# EAGLE board eib-32-intan-hs_panel (EAGLE 8.3.2)
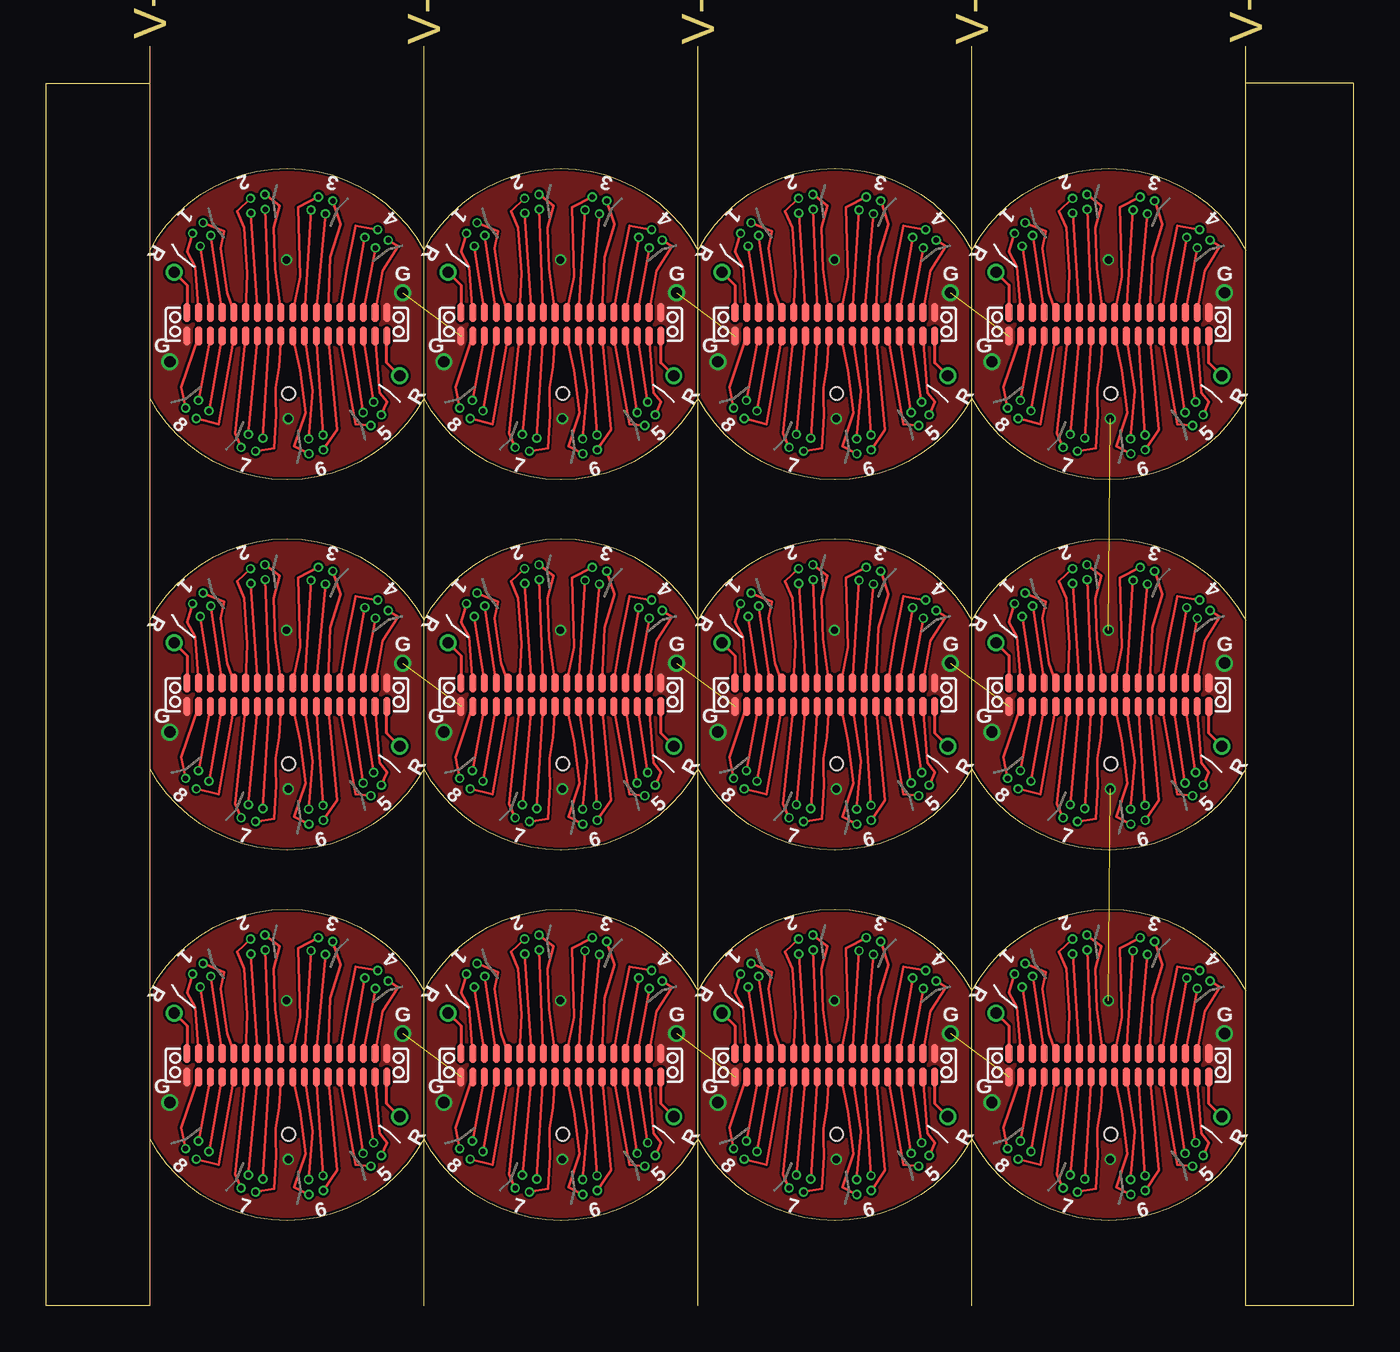
[diagram p0: board, top side]
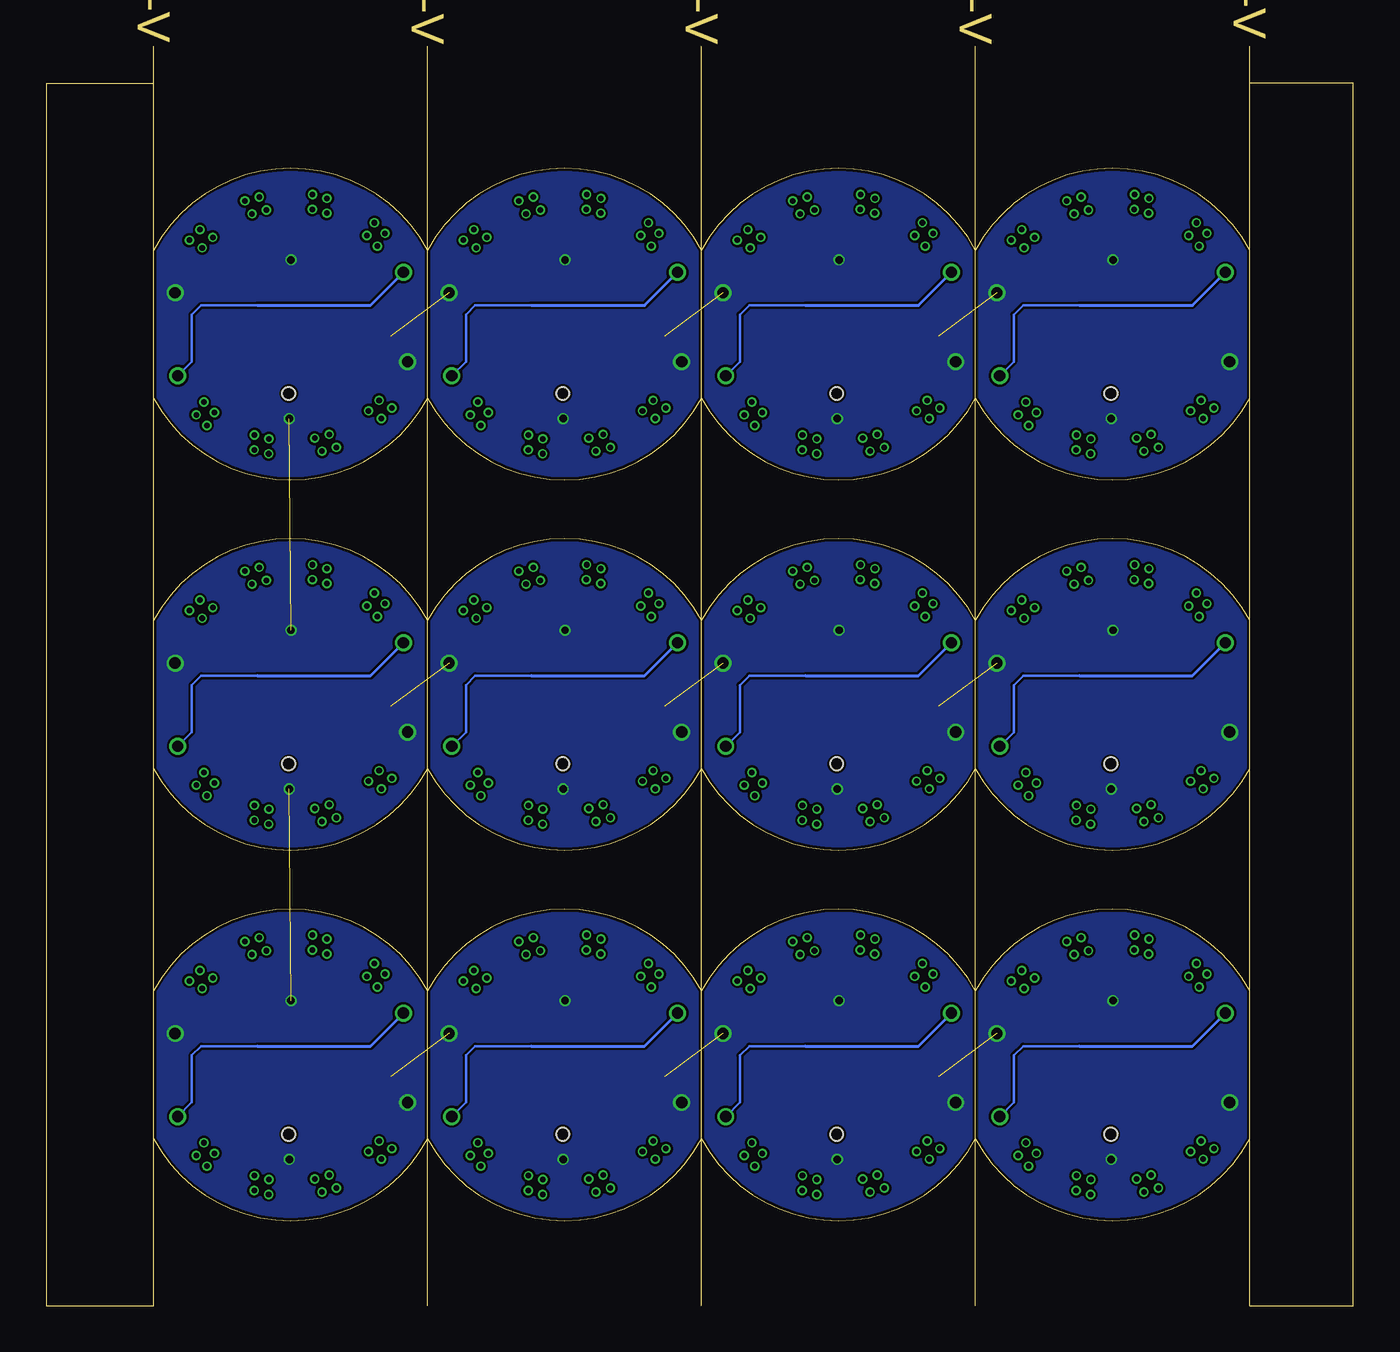
[diagram p1: board, bottom side, seen from below]

Size 70.6 x 68 mm. Coordinates in mm from the lower left corner, seen from the top.
Outline: 5.6,17 arc-123 20.4,17 arc-123 35.2,17 arc-123 50,17 arc-123 64.8,17
Outline: 5.6,9 arc123 20.4,9 arc123 35.2,9 arc123 50,9 arc123 64.8,9
Outline: 5.6,37 arc-123 20.4,37 arc-123 35.2,37 arc-123 50,37 arc-123 64.8,37
Outline: 5.6,29 arc123 20.4,29 arc123 35.2,29 arc123 50,29 arc123 64.8,29
Outline: 5.6,57 arc-123 20.4,57 arc-123 35.2,57 arc-123 50,57 arc-123 64.8,57
Outline: 5.6,49 arc123 20.4,49 arc123 35.2,49 arc123 50,49 arc123 64.8,49
Outline: 5.6,66 0,66 0,0 5.6,0 5.6,66
Outline: 20.4,0 20.4,68
Outline: 35.2,0 35.2,68
Outline: 50,0 50,68
Outline: 64.8,66 64.8,0 70.6,0 70.6,66 64.8,66
Outline: 64.8,66 64.8,68
Outline: 5.6,66 5.6,68
Copper layers (1*16): Top 0.035mm / dielectric 1.5mm / Bottom 0.035mm
Design rules "pcb-cart-standard-4-layer *": minimum track width 5mil, minimum drill 0.3mm, track to track 5mil, track to pad 5mil, pad to pad 5mil, via to via 5mil, smd to smd 5mil, copper to edge 6mil, drill to drill 6mil, minimum pad ring 3mil, minimum via ring 3mil, stop-mask expansion 2mil, vias tented up to drill 20mil, thermal gap 10mil
Holes 0.7 mm at 13.1,9.25 27.9,9.25 42.7,9.25 57.5,9.25 13.1,29.25 27.9,29.25 42.7,29.25 57.5,29.25 13.1,49.25 27.9,49.25 42.7,49.25 57.5,49.25

## Footprints (pad centres in the part's own frame; a part is rotated, then mirrored left to right if it is on the bottom)
NPD-36-VV-GS = smd 0.381 x 1.016: P$1 0,0; P$2 0.635,0; P$3 1.27,0; P$4 1.905,0; P$5 2.54,0; P$6 3.175,0; P$7 3.81,0; P$8 4.445,0; P$9 5.08,0; P$10 5.715,0; P$11 6.35,0; P$12 6.985,0; P$13 7.62,0; P$14 8.255,0; P$15 8.89,0; P$16 9.525,0; P$17 10.16,0; P$18 10.795,0; P$19 10.795,1.27; P$20 10.16,1.27; P$21 9.525,1.27; P$22 8.89,1.27; P$23 8.255,1.27; P$24 7.62,1.27; P$25 6.985,1.27; P$26 6.35,1.27; P$27 5.715,1.27; P$28 5.08,1.27; P$29 4.445,1.27; P$30 3.81,1.27; P$31 3.175,1.27; P$32 2.54,1.27; P$33 1.905,1.27; P$34 1.27,1.27; P$35 0.635,1.27; P$36 0,1.27
TET8 = drill 0.3 pad 0.5: P$1 -1,7; P$2 -0.2,7.1; P$3 -0.3,6.3; P$4 -1.1,6.2

## Placement (x,y rotation side)
J1  4  [NPD-36-VV-GS]  22.4,12.35 0 top
J2  4  [NPD-36-VV-GS]  37.2,12.35 0 top
J3  4  [NPD-36-VV-GS]  52,12.35 0 top
J4  4  [NPD-36-VV-GS]  7.6,32.35 0 top
J5  4  [NPD-36-VV-GS]  7.6,12.35 0 top
J6  4  [NPD-36-VV-GS]  22.4,32.35 0 top
J7  4  [NPD-36-VV-GS]  37.2,32.35 0 top
J8  4  [NPD-36-VV-GS]  52,32.35 0 top
J9  4  [NPD-36-VV-GS]  7.6,52.35 0 top
J10  4  [NPD-36-VV-GS]  22.4,52.35 0 top
J11  4  [NPD-36-VV-GS]  37.2,52.35 0 top
J12  4  [NPD-36-VV-GS]  52,52.35 0 top
TET1  0  [TET8]  27.8,13 8 top
TET2  1  [TET8]  27.8,13 38 top
TET3  4  [TET8]  27.8,13 128 top
TET4  5  [TET8]  27.8,13 158 top
TET5  6  [TET8]  27.8,13 188 top
TET6  7  [TET8]  27.8,13 218 top
TET7  10  [TET8]  27.8,13 308 top
TET8  11  [TET8]  27.8,13 338 top
TET9  0  [TET8]  42.6,13 8 top
TET10  1  [TET8]  42.6,13 38 top
TET11  4  [TET8]  42.6,13 128 top
TET12  5  [TET8]  42.6,13 158 top
TET13  6  [TET8]  42.6,13 188 top
TET14  7  [TET8]  42.6,13 218 top
TET15  10  [TET8]  42.6,13 308 top
TET16  11  [TET8]  42.6,13 338 top
TET17  0  [TET8]  57.4,13 8 top
TET18  1  [TET8]  57.4,13 38 top
TET19  4  [TET8]  57.4,13 128 top
TET20  5  [TET8]  57.4,13 158 top
TET21  6  [TET8]  57.4,13 188 top
TET22  7  [TET8]  57.4,13 218 top
TET23  10  [TET8]  57.4,13 308 top
TET24  11  [TET8]  57.4,13 338 top
TET25  0  [TET8]  13,33 8 top
TET26  1  [TET8]  13,33 38 top
TET27  4  [TET8]  13,33 128 top
TET28  5  [TET8]  13,33 158 top
TET29  6  [TET8]  13,33 188 top
TET30  7  [TET8]  13,33 218 top
TET31  10  [TET8]  13,33 308 top
TET32  11  [TET8]  13,33 338 top
TET33  0  [TET8]  27.8,33 8 top
TET34  1  [TET8]  27.8,33 38 top
TET35  4  [TET8]  27.8,33 128 top
TET36  5  [TET8]  27.8,33 158 top
TET37  6  [TET8]  27.8,33 188 top
TET38  7  [TET8]  27.8,33 218 top
TET39  10  [TET8]  27.8,33 308 top
TET40  11  [TET8]  27.8,33 338 top
TET41  0  [TET8]  42.6,33 8 top
TET42  1  [TET8]  42.6,33 38 top
TET43  4  [TET8]  42.6,33 128 top
TET44  5  [TET8]  42.6,33 158 top
TET45  6  [TET8]  42.6,33 188 top
TET46  7  [TET8]  42.6,33 218 top
TET47  10  [TET8]  42.6,33 308 top
TET48  11  [TET8]  42.6,33 338 top
TET49  0  [TET8]  57.4,33 8 top
TET50  1  [TET8]  57.4,33 38 top
TET51  4  [TET8]  57.4,33 128 top
TET52  5  [TET8]  57.4,33 158 top
TET53  6  [TET8]  57.4,33 188 top
TET54  7  [TET8]  57.4,33 218 top
TET55  10  [TET8]  57.4,33 308 top
TET56  11  [TET8]  57.4,33 338 top
TET57  0  [TET8]  13,53 8 top
TET58  1  [TET8]  13,53 38 top
TET59  4  [TET8]  13,53 128 top
TET60  5  [TET8]  13,53 158 top
TET61  6  [TET8]  13,53 188 top
TET62  7  [TET8]  13,53 218 top
TET63  10  [TET8]  13,53 308 top
TET64  0  [TET8]  13,13 8 top
TET65  1  [TET8]  13,13 38 top
TET66  4  [TET8]  13,13 128 top
TET67  5  [TET8]  13,13 158 top
TET68  6  [TET8]  13,13 188 top
TET69  7  [TET8]  13,13 218 top
TET70  10  [TET8]  13,13 308 top
TET71  11  [TET8]  13,13 338 top
TET72  11  [TET8]  13,53 338 top
TET73  0  [TET8]  27.8,53 8 top
TET74  1  [TET8]  27.8,53 38 top
TET75  4  [TET8]  27.8,53 128 top
TET76  5  [TET8]  27.8,53 158 top
TET77  6  [TET8]  27.8,53 188 top
TET78  7  [TET8]  27.8,53 218 top
TET79  10  [TET8]  27.8,53 308 top
TET80  11  [TET8]  27.8,53 338 top
TET81  0  [TET8]  42.6,53 8 top
TET82  1  [TET8]  42.6,53 38 top
TET83  4  [TET8]  42.6,53 128 top
TET84  5  [TET8]  42.6,53 158 top
TET85  6  [TET8]  42.6,53 188 top
TET86  7  [TET8]  42.6,53 218 top
TET87  10  [TET8]  42.6,53 308 top
TET88  11  [TET8]  42.6,53 338 top
TET89  0  [TET8]  57.4,53 8 top
TET90  1  [TET8]  57.4,53 38 top
TET91  4  [TET8]  57.4,53 128 top
TET92  5  [TET8]  57.4,53 158 top
TET93  6  [TET8]  57.4,53 188 top
TET94  7  [TET8]  57.4,53 218 top
TET95  10  [TET8]  57.4,53 308 top
TET96  11  [TET8]  57.4,53 338 top

## Library data of the parts
J1-J12 = open-ephys
TET1-TET96 = tetrodes

## Nets
GND: J1.P$1 J1.P$19 J2.P$1 J2.P$19 J3.P$1 J3.P$19 J4.P$1 J4.P$19 J5.P$1 J5.P$19 J6.P$1 J6.P$19 J7.P$1 J7.P$19 J8.P$1 J8.P$19 J9.P$1 J9.P$19 J10.P$1 J10.P$19 J11.P$1 J11.P$19 J12.P$1 J12.P$19
N$1: J1.P$35 TET2.P$1
N$2: J1.P$32 TET2.P$2
N$3: J1.P$33 TET2.P$3
N$4: J1.P$34 TET2.P$4
N$5: J1.P$28 TET1.P$2
N$6: J1.P$30 TET1.P$4
N$7: J1.P$29 TET1.P$3
N$8: J1.P$31 TET1.P$1
N$9: J1.P$27 TET8.P$1
N$10: J1.P$24 TET8.P$2
N$11: J1.P$26 TET8.P$4
N$12: J1.P$25 TET8.P$3
N$13: J1.P$23 TET7.P$1
N$14: J1.P$20 TET7.P$2
N$15: J1.P$22 TET7.P$4
N$16: J1.P$21 TET7.P$3
N$17: J1.P$17 TET6.P$1
N$18: J1.P$14 TET6.P$2
N$19: J1.P$16 TET6.P$4
N$20: J1.P$15 TET6.P$3
N$21: J1.P$13 TET5.P$1
N$22: J1.P$9 TET4.P$1
N$23: J1.P$5 TET3.P$1
N$24: J1.P$10 TET5.P$2
N$25: J1.P$12 TET5.P$4
N$26: J1.P$11 TET5.P$3
N$27: J1.P$7 TET4.P$3
N$28: J1.P$8 TET4.P$4
N$29: J1.P$6 TET4.P$2
N$30: J1.P$3 TET3.P$3
N$31: J1.P$4 TET3.P$4
N$32: J1.P$2 TET3.P$2
N$33: J2.P$35 TET10.P$1
N$34: J2.P$32 TET10.P$2
N$35: J2.P$33 TET10.P$3
N$36: J2.P$34 TET10.P$4
N$37: J2.P$28 TET9.P$2
N$38: J2.P$30 TET9.P$4
N$39: J2.P$29 TET9.P$3
N$40: J2.P$31 TET9.P$1
N$41: J2.P$27 TET16.P$1
N$42: J2.P$24 TET16.P$2
N$43: J2.P$26 TET16.P$4
N$44: J2.P$25 TET16.P$3
N$45: J2.P$23 TET15.P$1
N$46: J2.P$20 TET15.P$2
N$47: J2.P$22 TET15.P$4
N$48: J2.P$21 TET15.P$3
N$49: J2.P$17 TET14.P$1
N$50: J2.P$14 TET14.P$2
N$51: J2.P$16 TET14.P$4
N$52: J2.P$15 TET14.P$3
N$53: J2.P$13 TET13.P$1
N$54: J2.P$9 TET12.P$1
N$55: J2.P$5 TET11.P$1
N$56: J2.P$10 TET13.P$2
N$57: J2.P$12 TET13.P$4
N$58: J2.P$11 TET13.P$3
N$59: J2.P$7 TET12.P$3
N$60: J2.P$8 TET12.P$4
N$61: J2.P$6 TET12.P$2
N$62: J2.P$3 TET11.P$3
N$63: J2.P$4 TET11.P$4
N$64: J2.P$2 TET11.P$2
N$65: J3.P$35 TET18.P$1
N$66: J3.P$32 TET18.P$2
N$67: J3.P$33 TET18.P$3
N$68: J3.P$34 TET18.P$4
N$69: J3.P$28 TET17.P$2
N$70: J3.P$30 TET17.P$4
N$71: J3.P$29 TET17.P$3
N$72: J3.P$31 TET17.P$1
N$73: J3.P$27 TET24.P$1
N$74: J3.P$24 TET24.P$2
N$75: J3.P$26 TET24.P$4
N$76: J3.P$25 TET24.P$3
N$77: J3.P$23 TET23.P$1
N$78: J3.P$20 TET23.P$2
N$79: J3.P$22 TET23.P$4
N$80: J3.P$21 TET23.P$3
N$81: J3.P$17 TET22.P$1
N$82: J3.P$14 TET22.P$2
N$83: J3.P$16 TET22.P$4
N$84: J3.P$15 TET22.P$3
N$85: J3.P$13 TET21.P$1
N$86: J3.P$9 TET20.P$1
N$87: J3.P$5 TET19.P$1
N$88: J3.P$10 TET21.P$2
N$89: J3.P$12 TET21.P$4
N$90: J3.P$11 TET21.P$3
N$91: J3.P$7 TET20.P$3
N$92: J3.P$8 TET20.P$4
N$93: J3.P$6 TET20.P$2
N$94: J3.P$3 TET19.P$3
N$95: J3.P$4 TET19.P$4
N$96: J3.P$2 TET19.P$2
N$97: J4.P$35 TET26.P$1
N$98: J4.P$32 TET26.P$2
N$99: J4.P$33 TET26.P$3
N$100: J4.P$34 TET26.P$4
N$101: J4.P$28 TET25.P$2
N$102: J4.P$30 TET25.P$4
N$103: J4.P$29 TET25.P$3
N$104: J4.P$31 TET25.P$1
N$105: J4.P$27 TET32.P$1
N$106: J4.P$24 TET32.P$2
N$107: J4.P$26 TET32.P$4
N$108: J4.P$25 TET32.P$3
N$109: J4.P$23 TET31.P$1
N$110: J4.P$20 TET31.P$2
N$111: J4.P$22 TET31.P$4
N$112: J4.P$21 TET31.P$3
N$113: J4.P$17 TET30.P$1
N$114: J4.P$14 TET30.P$2
N$115: J4.P$16 TET30.P$4
N$116: J4.P$15 TET30.P$3
N$117: J4.P$13 TET29.P$1
N$118: J4.P$9 TET28.P$1
N$119: J4.P$5 TET27.P$1
N$120: J4.P$10 TET29.P$2
N$121: J4.P$12 TET29.P$4
N$122: J4.P$11 TET29.P$3
N$123: J4.P$7 TET28.P$3
N$124: J4.P$8 TET28.P$4
N$125: J4.P$6 TET28.P$2
N$126: J4.P$3 TET27.P$3
N$127: J4.P$4 TET27.P$4
N$128: J4.P$2 TET27.P$2
N$129: J6.P$35 TET34.P$1
N$130: J6.P$32 TET34.P$2
N$131: J6.P$33 TET34.P$3
N$132: J6.P$34 TET34.P$4
N$133: J6.P$28 TET33.P$2
N$134: J6.P$30 TET33.P$4
N$135: J6.P$29 TET33.P$3
N$136: J6.P$31 TET33.P$1
N$137: J6.P$27 TET40.P$1
N$138: J6.P$24 TET40.P$2
N$139: J6.P$26 TET40.P$4
N$140: J6.P$25 TET40.P$3
N$141: J6.P$23 TET39.P$1
N$142: J6.P$20 TET39.P$2
N$143: J6.P$22 TET39.P$4
N$144: J6.P$21 TET39.P$3
N$145: J6.P$17 TET38.P$1
N$146: J6.P$14 TET38.P$2
N$147: J6.P$16 TET38.P$4
N$148: J6.P$15 TET38.P$3
N$149: J6.P$13 TET37.P$1
N$150: J6.P$9 TET36.P$1
N$151: J6.P$5 TET35.P$1
N$152: J6.P$10 TET37.P$2
N$153: J6.P$12 TET37.P$4
N$154: J6.P$11 TET37.P$3
N$155: J6.P$7 TET36.P$3
N$156: J6.P$8 TET36.P$4
N$157: J6.P$6 TET36.P$2
N$158: J6.P$3 TET35.P$3
N$159: J6.P$4 TET35.P$4
N$160: J6.P$2 TET35.P$2
N$161: J7.P$35 TET42.P$1
N$162: J7.P$32 TET42.P$2
N$163: J7.P$33 TET42.P$3
N$164: J7.P$34 TET42.P$4
N$165: J7.P$28 TET41.P$2
N$166: J7.P$30 TET41.P$4
N$167: J7.P$29 TET41.P$3
N$168: J7.P$31 TET41.P$1
N$169: J7.P$27 TET48.P$1
N$170: J7.P$24 TET48.P$2
N$171: J7.P$26 TET48.P$4
N$172: J7.P$25 TET48.P$3
N$173: J7.P$23 TET47.P$1
N$174: J7.P$20 TET47.P$2
N$175: J7.P$22 TET47.P$4
N$176: J7.P$21 TET47.P$3
N$177: J7.P$17 TET46.P$1
N$178: J7.P$14 TET46.P$2
N$179: J7.P$16 TET46.P$4
N$180: J7.P$15 TET46.P$3
N$181: J7.P$13 TET45.P$1
N$182: J7.P$9 TET44.P$1
N$183: J7.P$5 TET43.P$1
N$184: J7.P$10 TET45.P$2
N$185: J7.P$12 TET45.P$4
N$186: J7.P$11 TET45.P$3
N$187: J7.P$7 TET44.P$3
N$188: J7.P$8 TET44.P$4
N$189: J7.P$6 TET44.P$2
N$190: J7.P$3 TET43.P$3
N$191: J7.P$4 TET43.P$4
N$192: J7.P$2 TET43.P$2
N$193: J8.P$35 TET50.P$1
N$194: J8.P$32 TET50.P$2
N$195: J8.P$33 TET50.P$3
N$196: J8.P$34 TET50.P$4
N$197: J8.P$28 TET49.P$2
N$198: J8.P$30 TET49.P$4
N$199: J8.P$29 TET49.P$3
N$200: J8.P$31 TET49.P$1
N$201: J8.P$27 TET56.P$1
N$202: J8.P$24 TET56.P$2
N$203: J8.P$26 TET56.P$4
N$204: J8.P$25 TET56.P$3
N$205: J8.P$23 TET55.P$1
N$206: J8.P$20 TET55.P$2
N$207: J8.P$22 TET55.P$4
N$208: J8.P$21 TET55.P$3
N$209: J8.P$17 TET54.P$1
N$210: J8.P$14 TET54.P$2
N$211: J8.P$16 TET54.P$4
N$212: J8.P$15 TET54.P$3
N$213: J8.P$13 TET53.P$1
N$214: J8.P$9 TET52.P$1
N$215: J8.P$5 TET51.P$1
N$216: J8.P$10 TET53.P$2
N$217: J8.P$12 TET53.P$4
N$218: J8.P$11 TET53.P$3
N$219: J8.P$7 TET52.P$3
N$220: J8.P$8 TET52.P$4
N$221: J8.P$6 TET52.P$2
N$222: J8.P$3 TET51.P$3
N$223: J8.P$4 TET51.P$4
N$224: J8.P$2 TET51.P$2
N$225: J9.P$35 TET58.P$1
N$226: J9.P$32 TET58.P$2
N$227: J9.P$33 TET58.P$3
N$228: J9.P$34 TET58.P$4
N$229: J9.P$28 TET57.P$2
N$230: J9.P$30 TET57.P$4
N$231: J9.P$29 TET57.P$3
N$232: J9.P$31 TET57.P$1
N$233: J9.P$27 TET72.P$1
N$234: J9.P$24 TET72.P$2
N$235: J9.P$26 TET72.P$4
N$236: J9.P$25 TET72.P$3
N$237: J9.P$23 TET63.P$1
N$238: J9.P$20 TET63.P$2
N$239: J9.P$22 TET63.P$4
N$240: J9.P$21 TET63.P$3
N$241: J9.P$17 TET62.P$1
N$242: J9.P$14 TET62.P$2
N$243: J9.P$16 TET62.P$4
N$244: J9.P$15 TET62.P$3
N$245: J9.P$13 TET61.P$1
N$246: J9.P$9 TET60.P$1
N$247: J9.P$5 TET59.P$1
N$248: J9.P$10 TET61.P$2
N$249: J9.P$12 TET61.P$4
N$250: J9.P$11 TET61.P$3
N$251: J9.P$7 TET60.P$3
N$252: J9.P$8 TET60.P$4
N$253: J9.P$6 TET60.P$2
N$254: J9.P$3 TET59.P$3
N$255: J9.P$4 TET59.P$4
N$256: J9.P$2 TET59.P$2
N$257: J5.P$35 TET65.P$1
N$258: J5.P$32 TET65.P$2
N$259: J5.P$33 TET65.P$3
N$260: J5.P$34 TET65.P$4
N$261: J5.P$28 TET64.P$2
N$262: J5.P$30 TET64.P$4
N$263: J5.P$29 TET64.P$3
N$264: J5.P$31 TET64.P$1
N$265: J5.P$27 TET71.P$1
N$266: J5.P$24 TET71.P$2
N$267: J5.P$26 TET71.P$4
N$268: J5.P$25 TET71.P$3
N$269: J5.P$23 TET70.P$1
N$270: J5.P$20 TET70.P$2
N$271: J5.P$22 TET70.P$4
N$272: J5.P$21 TET70.P$3
N$273: J5.P$17 TET69.P$1
N$274: J5.P$14 TET69.P$2
N$275: J5.P$16 TET69.P$4
N$276: J5.P$15 TET69.P$3
N$277: J5.P$13 TET68.P$1
N$278: J5.P$9 TET67.P$1
N$279: J5.P$5 TET66.P$1
N$280: J5.P$10 TET68.P$2
N$281: J5.P$12 TET68.P$4
N$282: J5.P$11 TET68.P$3
N$283: J5.P$7 TET67.P$3
N$284: J5.P$8 TET67.P$4
N$285: J5.P$6 TET67.P$2
N$286: J5.P$3 TET66.P$3
N$287: J5.P$4 TET66.P$4
N$288: J5.P$2 TET66.P$2
N$289: J10.P$35 TET74.P$1
N$290: J10.P$32 TET74.P$2
N$291: J10.P$33 TET74.P$3
N$292: J10.P$34 TET74.P$4
N$293: J10.P$28 TET73.P$2
N$294: J10.P$30 TET73.P$4
N$295: J10.P$29 TET73.P$3
N$296: J10.P$31 TET73.P$1
N$297: J10.P$27 TET80.P$1
N$298: J10.P$24 TET80.P$2
N$299: J10.P$26 TET80.P$4
N$300: J10.P$25 TET80.P$3
N$301: J10.P$23 TET79.P$1
N$302: J10.P$20 TET79.P$2
N$303: J10.P$22 TET79.P$4
N$304: J10.P$21 TET79.P$3
N$305: J10.P$17 TET78.P$1
N$306: J10.P$14 TET78.P$2
N$307: J10.P$16 TET78.P$4
N$308: J10.P$15 TET78.P$3
N$309: J10.P$13 TET77.P$1
N$310: J10.P$9 TET76.P$1
N$311: J10.P$5 TET75.P$1
N$312: J10.P$10 TET77.P$2
N$313: J10.P$12 TET77.P$4
N$314: J10.P$11 TET77.P$3
N$315: J10.P$7 TET76.P$3
N$316: J10.P$8 TET76.P$4
N$317: J10.P$6 TET76.P$2
N$318: J10.P$3 TET75.P$3
N$319: J10.P$4 TET75.P$4
N$320: J10.P$2 TET75.P$2
N$321: J11.P$35 TET82.P$1
N$322: J11.P$32 TET82.P$2
N$323: J11.P$33 TET82.P$3
N$324: J11.P$34 TET82.P$4
N$325: J11.P$28 TET81.P$2
N$326: J11.P$30 TET81.P$4
N$327: J11.P$29 TET81.P$3
N$328: J11.P$31 TET81.P$1
N$329: J11.P$27 TET88.P$1
N$330: J11.P$24 TET88.P$2
N$331: J11.P$26 TET88.P$4
N$332: J11.P$25 TET88.P$3
N$333: J11.P$23 TET87.P$1
N$334: J11.P$20 TET87.P$2
N$335: J11.P$22 TET87.P$4
N$336: J11.P$21 TET87.P$3
N$337: J11.P$17 TET86.P$1
N$338: J11.P$14 TET86.P$2
N$339: J11.P$16 TET86.P$4
N$340: J11.P$15 TET86.P$3
N$341: J11.P$13 TET85.P$1
N$342: J11.P$9 TET84.P$1
N$343: J11.P$5 TET83.P$1
N$344: J11.P$10 TET85.P$2
N$345: J11.P$12 TET85.P$4
N$346: J11.P$11 TET85.P$3
N$347: J11.P$7 TET84.P$3
N$348: J11.P$8 TET84.P$4
N$349: J11.P$6 TET84.P$2
N$350: J11.P$3 TET83.P$3
N$351: J11.P$4 TET83.P$4
N$352: J11.P$2 TET83.P$2
N$353: J12.P$35 TET90.P$1
N$354: J12.P$32 TET90.P$2
N$355: J12.P$33 TET90.P$3
N$356: J12.P$34 TET90.P$4
N$357: J12.P$28 TET89.P$2
N$358: J12.P$30 TET89.P$4
N$359: J12.P$29 TET89.P$3
N$360: J12.P$31 TET89.P$1
N$361: J12.P$27 TET96.P$1
N$362: J12.P$24 TET96.P$2
N$363: J12.P$26 TET96.P$4
N$364: J12.P$25 TET96.P$3
N$365: J12.P$23 TET95.P$1
N$366: J12.P$20 TET95.P$2
N$367: J12.P$22 TET95.P$4
N$368: J12.P$21 TET95.P$3
N$369: J12.P$17 TET94.P$1
N$370: J12.P$14 TET94.P$2
N$371: J12.P$16 TET94.P$4
N$372: J12.P$15 TET94.P$3
N$373: J12.P$13 TET93.P$1
N$374: J12.P$9 TET92.P$1
N$375: J12.P$5 TET91.P$1
N$376: J12.P$10 TET93.P$2
N$377: J12.P$12 TET93.P$4
N$378: J12.P$11 TET93.P$3
N$379: J12.P$7 TET92.P$3
N$380: J12.P$8 TET92.P$4
N$381: J12.P$6 TET92.P$2
N$382: J12.P$3 TET91.P$3
N$383: J12.P$4 TET91.P$4
N$384: J12.P$2 TET91.P$2
REF1: J1.P$18 J1.P$36
REF2: J2.P$18 J2.P$36
REF3: J3.P$18 J3.P$36
REF4: J5.P$18 J5.P$36
REF5: J4.P$18 J4.P$36
REF6: J6.P$18 J6.P$36
REF7: J7.P$18 J7.P$36
REF8: J8.P$18 J8.P$36
REF9: J9.P$18 J9.P$36
REF10: J10.P$18 J10.P$36
REF11: J11.P$18 J11.P$36
REF12: J12.P$18 J12.P$36

## Tracks (layer width: path | path; a pad name or v marks a point on that pad's centre or on a via)
GND  (via drill 0.4, 0.61)  (11 unrouted)
  Top 0.128: 18.92,14.46 v19.25,14.69 | 33.72,14.46 v34.05,14.69 | 48.52,14.46 v48.85,14.69 | 63.32,14.46 v63.65,14.69 | 18.92,54.46 v19.25,54.69 | 33.72,54.46 v34.05,54.69 | 48.52,54.46 v48.85,54.69 | 63.32,54.46 v63.65,54.69 | 18.92,34.46 v19.25,34.69 | 33.72,34.46 v34.05,34.69 | 48.52,34.46 v48.85,34.69 | 63.32,34.46 v63.65,34.69
  other vias: 12.98,16.47 13.07,7.9 6.68,10.97 27.78,16.47 27.87,7.9 21.48,10.97 42.58,16.47 42.67,7.9 36.28,10.97 57.38,16.47 57.47,7.9 51.08,10.97 12.98,56.47 13.07,47.9 6.68,50.97 27.78,56.47 27.87,47.9 21.48,50.97 42.58,56.47 42.67,47.9 36.28,50.97 57.38,56.47 57.47,47.9 51.08,50.97 12.98,36.47 13.07,27.9 6.68,30.97 27.78,36.47 27.87,27.9 21.48,30.97 42.58,36.47 42.67,27.9 36.28,30.97 57.38,36.47 57.47,27.9 51.08,30.97
  pour Bottom (no thermals): -7.55,124.35 123.45,124.35 123.45,-8.65 -7.55,-8.65
  pour Top (no thermals): -10.55,127.35 126.45,127.35 126.45,-11.65 -10.55,-11.65
N$1
  Top 0.127: J1.P$35 22.84,16.1 22.4,16.9 TET2.P$1
N$2
  Top 0.127: J1.P$32 24.57,14.7 24.21,17.1 24.4,18 TET2.P$2
N$3
  Top 0.127: TET2.P$3 J1.P$33
N$4
  Top 0.127: TET2.P$4 J1.P$34
N$5
  Top 0.127: J1.P$28 27.16,16 27.07,18.2 27.4,19.4 TET1.P$2
N$6
  Top 0.127: TET1.P$4 J1.P$30
N$7
  Top 0.127: J1.P$29 TET1.P$3
N$8
  Top 0.127: J1.P$31 25.66,15.74 25.5,18.19 25.1,19.1 TET1.P$1
N$9
  Top 0.127: J1.P$27 28.5,15.56 28.4,19.3 TET8.P$1
N$10
  Top 0.127: J1.P$24 30.15,16.61 30.7,18.4 TET8.P$2
N$11
  Top 0.127: TET8.P$4 J1.P$26
N$12
  Top 0.127: TET8.P$3 J1.P$25
N$13
  Top 0.127: J1.P$23 31.01,15.9 31.5,18.3 TET7.P$1
N$14
  Top 0.127: J1.P$20 32.97,15.89 33.8,17.2 TET7.P$2
N$15
  Top 0.127: TET7.P$4 J1.P$22
N$16
  Top 0.127: TET7.P$3 J1.P$21
N$17
  Top 0.127: J1.P$17 32.8,9.3 33.2,8.8 TET6.P$1
N$18
  Top 0.127: TET6.P$2 31.5,7.6 J1.P$14
N$19
  Top 0.127: TET6.P$4 J1.P$16
N$20
  Top 0.127: TET6.P$3 J1.P$15
N$21
  Top 0.127: J1.P$13 30.5,7.3 TET5.P$1
N$22
  Top 0.127: TET4.P$1 27.1,6.3 27.21,8.1 27.18,8.95 27.18,8.96 27.18,9.55 27.38,10.7 J1.P$9
N$23
  Top 0.127: TET3.P$1 24.1,7.6 J1.P$5
N$24
  Top 0.127: TET5.P$2 28.2,6.4 28.8,8.2 28.5,10.5 J1.P$10
N$25
  Top 0.127: TET5.P$4 J1.P$12
N$26
  Top 0.127: J1.P$11 29.2,9.4 TET5.P$3
N$27
  Top 0.127: TET4.P$3 J1.P$7
N$28
  Top 0.127: TET4.P$4 J1.P$8
N$29
  Top 0.127: TET4.P$2 25,7.1 J1.P$6
N$30
  Top 0.127: TET3.P$3 J1.P$3
N$31
  Top 0.127: TET3.P$4 J1.P$4
N$32
  Top 0.127: TET3.P$2 22.1,9.6 J1.P$2
N$33
  Top 0.127: J2.P$35 37.64,16.1 37.2,16.9 TET10.P$1
N$34
  Top 0.127: J2.P$32 39.37,14.7 39.01,17.1 39.2,18 TET10.P$2
N$35
  Top 0.127: TET10.P$3 J2.P$33
N$36
  Top 0.127: TET10.P$4 J2.P$34
N$37
  Top 0.127: J2.P$28 41.96,16 41.87,18.2 42.2,19.4 TET9.P$2
N$38
  Top 0.127: TET9.P$4 J2.P$30
N$39
  Top 0.127: J2.P$29 TET9.P$3
N$40
  Top 0.127: J2.P$31 40.46,15.74 40.3,18.19 39.9,19.1 TET9.P$1
N$41
  Top 0.127: J2.P$27 43.3,15.56 43.2,19.3 TET16.P$1
N$42
  Top 0.127: J2.P$24 44.95,16.61 45.5,18.4 TET16.P$2
N$43
  Top 0.127: TET16.P$4 J2.P$26
N$44
  Top 0.127: TET16.P$3 J2.P$25
N$45
  Top 0.127: J2.P$23 45.81,15.9 46.3,18.3 TET15.P$1
N$46
  Top 0.127: J2.P$20 47.77,15.89 48.6,17.2 TET15.P$2
N$47
  Top 0.127: TET15.P$4 J2.P$22
N$48
  Top 0.127: TET15.P$3 J2.P$21
N$49
  Top 0.127: J2.P$17 47.6,9.3 48,8.8 TET14.P$1
N$50
  Top 0.127: TET14.P$2 46.3,7.6 J2.P$14
N$51
  Top 0.127: TET14.P$4 J2.P$16
N$52
  Top 0.127: TET14.P$3 J2.P$15
N$53
  Top 0.127: J2.P$13 45.3,7.3 TET13.P$1
N$54
  Top 0.127: TET12.P$1 41.9,6.3 42.01,8.1 41.98,8.95 41.98,8.96 41.98,9.55 42.18,10.7 J2.P$9
N$55
  Top 0.127: TET11.P$1 38.9,7.6 J2.P$5
N$56
  Top 0.127: TET13.P$2 43,6.4 43.6,8.2 43.3,10.5 J2.P$10
N$57
  Top 0.127: TET13.P$4 J2.P$12
N$58
  Top 0.127: J2.P$11 44,9.4 TET13.P$3
N$59
  Top 0.127: TET12.P$3 J2.P$7
N$60
  Top 0.127: TET12.P$4 J2.P$8
N$61
  Top 0.127: TET12.P$2 39.8,7.1 J2.P$6
N$62
  Top 0.127: TET11.P$3 J2.P$3
N$63
  Top 0.127: TET11.P$4 J2.P$4
N$64
  Top 0.127: TET11.P$2 36.9,9.6 J2.P$2
N$65
  Top 0.127: J3.P$35 52.44,16.1 52,16.9 TET18.P$1
N$66
  Top 0.127: J3.P$32 54.17,14.7 53.81,17.1 54,18 TET18.P$2
N$67
  Top 0.127: TET18.P$3 J3.P$33
N$68
  Top 0.127: TET18.P$4 J3.P$34
N$69
  Top 0.127: J3.P$28 56.76,16 56.67,18.2 57,19.4 TET17.P$2
N$70
  Top 0.127: TET17.P$4 J3.P$30
N$71
  Top 0.127: J3.P$29 TET17.P$3
N$72
  Top 0.127: J3.P$31 55.26,15.74 55.1,18.19 54.7,19.1 TET17.P$1
N$73
  Top 0.127: J3.P$27 58.1,15.56 58,19.3 TET24.P$1
N$74
  Top 0.127: J3.P$24 59.75,16.61 60.3,18.4 TET24.P$2
N$75
  Top 0.127: TET24.P$4 J3.P$26
N$76
  Top 0.127: TET24.P$3 J3.P$25
N$77
  Top 0.127: J3.P$23 60.61,15.9 61.1,18.3 TET23.P$1
N$78
  Top 0.127: J3.P$20 62.57,15.89 63.4,17.2 TET23.P$2
N$79
  Top 0.127: TET23.P$4 J3.P$22
N$80
  Top 0.127: TET23.P$3 J3.P$21
N$81
  Top 0.127: J3.P$17 62.4,9.3 62.8,8.8 TET22.P$1
N$82
  Top 0.127: TET22.P$2 61.1,7.6 J3.P$14
N$83
  Top 0.127: TET22.P$4 J3.P$16
N$84
  Top 0.127: TET22.P$3 J3.P$15
N$85
  Top 0.127: J3.P$13 60.1,7.3 TET21.P$1
N$86
  Top 0.127: TET20.P$1 56.7,6.3 56.81,8.1 56.78,8.95 56.78,8.96 56.78,9.55 56.98,10.7 J3.P$9
N$87
  Top 0.127: TET19.P$1 53.7,7.6 J3.P$5
N$88
  Top 0.127: TET21.P$2 57.8,6.4 58.4,8.2 58.1,10.5 J3.P$10
N$89
  Top 0.127: TET21.P$4 J3.P$12
N$90
  Top 0.127: J3.P$11 58.8,9.4 TET21.P$3
N$91
  Top 0.127: TET20.P$3 J3.P$7
N$92
  Top 0.127: TET20.P$4 J3.P$8
N$93
  Top 0.127: TET20.P$2 54.6,7.1 J3.P$6
N$94
  Top 0.127: TET19.P$3 J3.P$3
N$95
  Top 0.127: TET19.P$4 J3.P$4
N$96
  Top 0.127: TET19.P$2 51.7,9.6 J3.P$2
N$97
  Top 0.127: J4.P$35 8.04,36.1 7.6,36.9 TET26.P$1
N$98
  Top 0.127: J4.P$32 9.77,34.7 9.41,37.1 9.6,38 TET26.P$2
N$99
  Top 0.127: TET26.P$3 J4.P$33
N$100
  Top 0.127: TET26.P$4 J4.P$34
N$101
  Top 0.127: J4.P$28 12.36,36 12.27,38.2 12.6,39.4 TET25.P$2
N$102
  Top 0.127: TET25.P$4 J4.P$30
N$103
  Top 0.127: J4.P$29 TET25.P$3
N$104
  Top 0.127: J4.P$31 10.86,35.74 10.7,38.19 10.3,39.1 TET25.P$1
N$105
  Top 0.127: J4.P$27 13.7,35.56 13.6,39.3 TET32.P$1
N$106
  Top 0.127: J4.P$24 15.35,36.61 15.9,38.4 TET32.P$2
N$107
  Top 0.127: TET32.P$4 J4.P$26
N$108
  Top 0.127: TET32.P$3 J4.P$25
N$109
  Top 0.127: J4.P$23 16.21,35.9 16.7,38.3 TET31.P$1
N$110
  Top 0.127: J4.P$20 18.17,35.89 19,37.2 TET31.P$2
N$111
  Top 0.127: TET31.P$4 J4.P$22
N$112
  Top 0.127: TET31.P$3 J4.P$21
N$113
  Top 0.127: J4.P$17 18,29.3 18.4,28.8 TET30.P$1
N$114
  Top 0.127: TET30.P$2 16.7,27.6 J4.P$14
N$115
  Top 0.127: TET30.P$4 J4.P$16
N$116
  Top 0.127: TET30.P$3 J4.P$15
N$117
  Top 0.127: J4.P$13 15.7,27.3 TET29.P$1
N$118
  Top 0.127: TET28.P$1 12.3,26.3 12.41,28.1 12.38,28.95 12.38,29.55 12.58,30.7 J4.P$9
N$119
  Top 0.127: TET27.P$1 9.3,27.6 J4.P$5
N$120
  Top 0.127: TET29.P$2 13.4,26.4 14,28.2 13.7,30.5 J4.P$10
N$121
  Top 0.127: TET29.P$4 J4.P$12
N$122
  Top 0.127: J4.P$11 14.4,29.4 TET29.P$3
N$123
  Top 0.127: TET28.P$3 J4.P$7
N$124
  Top 0.127: TET28.P$4 J4.P$8
N$125
  Top 0.127: TET28.P$2 10.2,27.1 J4.P$6
N$126
  Top 0.127: TET27.P$3 J4.P$3
N$127
  Top 0.127: TET27.P$4 J4.P$4
N$128
  Top 0.127: TET27.P$2 7.3,29.6 J4.P$2
N$129
  Top 0.127: J6.P$35 22.84,36.1 22.4,36.9 TET34.P$1
N$130
  Top 0.127: J6.P$32 24.57,34.7 24.21,37.1 24.4,38 TET34.P$2
N$131
  Top 0.127: TET34.P$3 J6.P$33
N$132
  Top 0.127: TET34.P$4 J6.P$34
N$133
  Top 0.127: J6.P$28 27.16,36 27.07,38.2 27.4,39.4 TET33.P$2
N$134
  Top 0.127: TET33.P$4 J6.P$30
N$135
  Top 0.127: J6.P$29 TET33.P$3
N$136
  Top 0.127: J6.P$31 25.66,35.74 25.5,38.19 25.1,39.1 TET33.P$1
N$137
  Top 0.127: J6.P$27 28.5,35.56 28.4,39.3 TET40.P$1
N$138
  Top 0.127: J6.P$24 30.15,36.61 30.7,38.4 TET40.P$2
N$139
  Top 0.127: TET40.P$4 J6.P$26
N$140
  Top 0.127: TET40.P$3 J6.P$25
N$141
  Top 0.127: J6.P$23 31.01,35.9 31.5,38.3 TET39.P$1
N$142
  Top 0.127: J6.P$20 32.97,35.89 33.8,37.2 TET39.P$2
N$143
  Top 0.127: TET39.P$4 J6.P$22
N$144
  Top 0.127: TET39.P$3 J6.P$21
N$145
  Top 0.127: J6.P$17 32.8,29.3 33.2,28.8 TET38.P$1
N$146
  Top 0.127: TET38.P$2 31.5,27.6 J6.P$14
N$147
  Top 0.127: TET38.P$4 J6.P$16
N$148
  Top 0.127: TET38.P$3 J6.P$15
N$149
  Top 0.127: J6.P$13 30.5,27.3 TET37.P$1
N$150
  Top 0.127: TET36.P$1 27.1,26.3 27.21,28.1 27.18,28.95 27.18,29.55 27.38,30.7 J6.P$9
N$151
  Top 0.127: TET35.P$1 24.1,27.6 J6.P$5
N$152
  Top 0.127: TET37.P$2 28.2,26.4 28.8,28.2 28.5,30.5 J6.P$10
N$153
  Top 0.127: TET37.P$4 J6.P$12
N$154
  Top 0.127: J6.P$11 29.2,29.4 TET37.P$3
N$155
  Top 0.127: TET36.P$3 J6.P$7
N$156
  Top 0.127: TET36.P$4 J6.P$8
N$157
  Top 0.127: TET36.P$2 25,27.1 J6.P$6
N$158
  Top 0.127: TET35.P$3 J6.P$3
N$159
  Top 0.127: TET35.P$4 J6.P$4
N$160
  Top 0.127: TET35.P$2 22.1,29.6 J6.P$2
N$161
  Top 0.127: J7.P$35 37.64,36.1 37.2,36.9 TET42.P$1
N$162
  Top 0.127: J7.P$32 39.37,34.7 39.01,37.1 39.2,38 TET42.P$2
N$163
  Top 0.127: TET42.P$3 J7.P$33
N$164
  Top 0.127: TET42.P$4 J7.P$34
N$165
  Top 0.127: J7.P$28 41.96,36 41.87,38.2 42.2,39.4 TET41.P$2
N$166
  Top 0.127: TET41.P$4 J7.P$30
N$167
  Top 0.127: J7.P$29 TET41.P$3
N$168
  Top 0.127: J7.P$31 40.46,35.74 40.3,38.19 39.9,39.1 TET41.P$1
N$169
  Top 0.127: J7.P$27 43.3,35.56 43.2,39.3 TET48.P$1
N$170
  Top 0.127: J7.P$24 44.95,36.61 45.5,38.4 TET48.P$2
N$171
  Top 0.127: TET48.P$4 J7.P$26
N$172
  Top 0.127: TET48.P$3 J7.P$25
N$173
  Top 0.127: J7.P$23 45.81,35.9 46.3,38.3 TET47.P$1
N$174
  Top 0.127: J7.P$20 47.77,35.89 48.6,37.2 TET47.P$2
N$175
  Top 0.127: TET47.P$4 J7.P$22
N$176
  Top 0.127: TET47.P$3 J7.P$21
N$177
  Top 0.127: J7.P$17 47.6,29.3 48,28.8 TET46.P$1
N$178
  Top 0.127: TET46.P$2 46.3,27.6 J7.P$14
N$179
  Top 0.127: TET46.P$4 J7.P$16
N$180
  Top 0.127: TET46.P$3 J7.P$15
N$181
  Top 0.127: J7.P$13 45.3,27.3 TET45.P$1
N$182
  Top 0.127: TET44.P$1 41.9,26.3 42.01,28.1 41.98,28.95 41.98,29.55 42.18,30.7 J7.P$9
N$183
  Top 0.127: TET43.P$1 38.9,27.6 J7.P$5
N$184
  Top 0.127: TET45.P$2 43,26.4 43.6,28.2 43.3,30.5 J7.P$10
N$185
  Top 0.127: TET45.P$4 J7.P$12
N$186
  Top 0.127: J7.P$11 44,29.4 TET45.P$3
N$187
  Top 0.127: TET44.P$3 J7.P$7
N$188
  Top 0.127: TET44.P$4 J7.P$8
N$189
  Top 0.127: TET44.P$2 39.8,27.1 J7.P$6
N$190
  Top 0.127: TET43.P$3 J7.P$3
N$191
  Top 0.127: TET43.P$4 J7.P$4
N$192
  Top 0.127: TET43.P$2 36.9,29.6 J7.P$2
N$193
  Top 0.127: J8.P$35 52.44,36.1 52,36.9 TET50.P$1
N$194
  Top 0.127: J8.P$32 54.17,34.7 53.81,37.1 54,38 TET50.P$2
N$195
  Top 0.127: TET50.P$3 J8.P$33
N$196
  Top 0.127: TET50.P$4 J8.P$34
N$197
  Top 0.127: J8.P$28 56.76,36 56.67,38.2 57,39.4 TET49.P$2
N$198
  Top 0.127: TET49.P$4 J8.P$30
N$199
  Top 0.127: J8.P$29 TET49.P$3
N$200
  Top 0.127: J8.P$31 55.26,35.74 55.1,38.19 54.7,39.1 TET49.P$1
N$201
  Top 0.127: J8.P$27 58.1,35.56 58,39.3 TET56.P$1
N$202
  Top 0.127: J8.P$24 59.75,36.61 60.3,38.4 TET56.P$2
N$203
  Top 0.127: TET56.P$4 J8.P$26
N$204
  Top 0.127: TET56.P$3 J8.P$25
N$205
  Top 0.127: J8.P$23 60.61,35.9 61.1,38.3 TET55.P$1
N$206
  Top 0.127: J8.P$20 62.57,35.89 63.4,37.2 TET55.P$2
N$207
  Top 0.127: TET55.P$4 J8.P$22
N$208
  Top 0.127: TET55.P$3 J8.P$21
N$209
  Top 0.127: J8.P$17 62.4,29.3 62.8,28.8 TET54.P$1
N$210
  Top 0.127: TET54.P$2 61.1,27.6 J8.P$14
N$211
  Top 0.127: TET54.P$4 J8.P$16
N$212
  Top 0.127: TET54.P$3 J8.P$15
N$213
  Top 0.127: J8.P$13 60.1,27.3 TET53.P$1
N$214
  Top 0.127: TET52.P$1 56.7,26.3 56.81,28.1 56.78,28.95 56.78,29.55 56.98,30.7 J8.P$9
N$215
  Top 0.127: TET51.P$1 53.7,27.6 J8.P$5
N$216
  Top 0.127: TET53.P$2 57.8,26.4 58.4,28.2 58.1,30.5 J8.P$10
N$217
  Top 0.127: TET53.P$4 J8.P$12
N$218
  Top 0.127: J8.P$11 58.8,29.4 TET53.P$3
N$219
  Top 0.127: TET52.P$3 J8.P$7
N$220
  Top 0.127: TET52.P$4 J8.P$8
N$221
  Top 0.127: TET52.P$2 54.6,27.1 J8.P$6
N$222
  Top 0.127: TET51.P$3 J8.P$3
N$223
  Top 0.127: TET51.P$4 J8.P$4
N$224
  Top 0.127: TET51.P$2 51.7,29.6 J8.P$2
N$225
  Top 0.127: J9.P$35 8.04,56.1 7.6,56.9 TET58.P$1
N$226
  Top 0.127: J9.P$32 9.77,54.7 9.41,57.1 9.6,58 TET58.P$2
N$227
  Top 0.127: TET58.P$3 J9.P$33
N$228
  Top 0.127: TET58.P$4 J9.P$34
N$229
  Top 0.127: J9.P$28 12.36,55.99 12.27,58.2 12.6,59.4 TET57.P$2
N$230
  Top 0.127: TET57.P$4 J9.P$30
N$231
  Top 0.127: J9.P$29 TET57.P$3
N$232
  Top 0.127: J9.P$31 10.86,55.74 10.7,58.19 10.3,59.1 TET57.P$1
N$233
  Top 0.127: J9.P$27 13.7,55.56 13.6,59.3 TET72.P$1
N$234
  Top 0.127: J9.P$24 15.35,56.61 15.9,58.4 TET72.P$2
N$235
  Top 0.127: TET72.P$4 J9.P$26
N$236
  Top 0.127: TET72.P$3 J9.P$25
N$237
  Top 0.127: J9.P$23 16.21,55.9 16.7,58.3 TET63.P$1
N$238
  Top 0.127: J9.P$20 18.17,55.89 19,57.2 TET63.P$2
N$239
  Top 0.127: TET63.P$4 J9.P$22
N$240
  Top 0.127: TET63.P$3 J9.P$21
N$241
  Top 0.127: J9.P$17 18,49.3 18.4,48.8 TET62.P$1
N$242
  Top 0.127: TET62.P$2 16.7,47.6 J9.P$14
N$243
  Top 0.127: TET62.P$4 J9.P$16
N$244
  Top 0.127: TET62.P$3 J9.P$15
N$245
  Top 0.127: J9.P$13 15.7,47.3 TET61.P$1
N$246
  Top 0.127: TET60.P$1 12.3,46.3 12.41,48.1 12.38,48.95 12.38,49.55 12.58,50.7 J9.P$9
N$247
  Top 0.127: TET59.P$1 9.3,47.6 J9.P$5
N$248
  Top 0.127: TET61.P$2 13.4,46.4 14,48.2 13.7,50.5 J9.P$10
N$249
  Top 0.127: TET61.P$4 J9.P$12
N$250
  Top 0.127: J9.P$11 14.4,49.4 TET61.P$3
N$251
  Top 0.127: TET60.P$3 J9.P$7
N$252
  Top 0.127: TET60.P$4 J9.P$8
N$253
  Top 0.127: TET60.P$2 10.2,47.1 J9.P$6
N$254
  Top 0.127: TET59.P$3 J9.P$3
N$255
  Top 0.127: TET59.P$4 J9.P$4
N$256
  Top 0.127: TET59.P$2 7.3,49.6 J9.P$2
N$257
  Top 0.127: J5.P$35 8.04,16.1 7.6,16.9 TET65.P$1
N$258
  Top 0.127: J5.P$32 9.77,14.7 9.41,17.1 9.6,18 TET65.P$2
N$259
  Top 0.127: TET65.P$3 J5.P$33
N$260
  Top 0.127: TET65.P$4 J5.P$34
N$261
  Top 0.127: J5.P$28 12.36,16 12.27,18.2 12.6,19.4 TET64.P$2
N$262
  Top 0.127: TET64.P$4 J5.P$30
N$263
  Top 0.127: J5.P$29 TET64.P$3
N$264
  Top 0.127: J5.P$31 10.86,15.74 10.7,18.19 10.3,19.1 TET64.P$1
N$265
  Top 0.127: J5.P$27 13.7,15.56 13.6,19.3 TET71.P$1
N$266
  Top 0.127: J5.P$24 15.35,16.61 15.9,18.4 TET71.P$2
N$267
  Top 0.127: TET71.P$4 J5.P$26
N$268
  Top 0.127: TET71.P$3 J5.P$25
N$269
  Top 0.127: J5.P$23 16.21,15.9 16.7,18.3 TET70.P$1
N$270
  Top 0.127: J5.P$20 18.17,15.89 19,17.2 TET70.P$2
N$271
  Top 0.127: TET70.P$4 J5.P$22
N$272
  Top 0.127: TET70.P$3 J5.P$21
N$273
  Top 0.127: J5.P$17 18,9.3 18.4,8.8 TET69.P$1
N$274
  Top 0.127: TET69.P$2 16.7,7.6 J5.P$14
N$275
  Top 0.127: TET69.P$4 J5.P$16
N$276
  Top 0.127: TET69.P$3 J5.P$15
N$277
  Top 0.127: J5.P$13 15.7,7.3 TET68.P$1
N$278
  Top 0.127: TET67.P$1 12.3,6.3 12.41,8.1 12.38,8.95 12.38,8.96 12.38,9.55 12.58,10.7 J5.P$9
N$279
  Top 0.127: TET66.P$1 9.3,7.6 J5.P$5
N$280
  Top 0.127: TET68.P$2 13.4,6.4 14,8.2 13.7,10.5 J5.P$10
N$281
  Top 0.127: TET68.P$4 J5.P$12
N$282
  Top 0.127: J5.P$11 14.4,9.4 TET68.P$3
N$283
  Top 0.127: TET67.P$3 J5.P$7
N$284
  Top 0.127: TET67.P$4 J5.P$8
N$285
  Top 0.127: TET67.P$2 10.2,7.1 J5.P$6
N$286
  Top 0.127: TET66.P$3 J5.P$3
N$287
  Top 0.127: TET66.P$4 J5.P$4
N$288
  Top 0.127: TET66.P$2 7.3,9.6 J5.P$2
N$289
  Top 0.127: J10.P$35 22.84,56.1 22.4,56.9 TET74.P$1
N$290
  Top 0.127: J10.P$32 24.57,54.7 24.21,57.1 24.4,58 TET74.P$2
N$291
  Top 0.127: TET74.P$3 J10.P$33
N$292
  Top 0.127: TET74.P$4 J10.P$34
N$293
  Top 0.127: J10.P$28 27.16,55.99 27.07,58.2 27.4,59.4 TET73.P$2
N$294
  Top 0.127: TET73.P$4 J10.P$30
N$295
  Top 0.127: J10.P$29 TET73.P$3
N$296
  Top 0.127: J10.P$31 25.66,55.74 25.5,58.19 25.1,59.1 TET73.P$1
N$297
  Top 0.127: J10.P$27 28.5,55.56 28.4,59.3 TET80.P$1
N$298
  Top 0.127: J10.P$24 30.15,56.61 30.7,58.4 TET80.P$2
N$299
  Top 0.127: TET80.P$4 J10.P$26
N$300
  Top 0.127: TET80.P$3 J10.P$25
N$301
  Top 0.127: J10.P$23 31.01,55.9 31.5,58.3 TET79.P$1
N$302
  Top 0.127: J10.P$20 32.97,55.89 33.8,57.2 TET79.P$2
N$303
  Top 0.127: TET79.P$4 J10.P$22
N$304
  Top 0.127: TET79.P$3 J10.P$21
N$305
  Top 0.127: J10.P$17 32.8,49.3 33.2,48.8 TET78.P$1
N$306
  Top 0.127: TET78.P$2 31.5,47.6 J10.P$14
N$307
  Top 0.127: TET78.P$4 J10.P$16
N$308
  Top 0.127: TET78.P$3 J10.P$15
N$309
  Top 0.127: J10.P$13 30.5,47.3 TET77.P$1
N$310
  Top 0.127: TET76.P$1 27.1,46.3 27.21,48.1 27.18,48.95 27.18,49.55 27.38,50.7 J10.P$9
N$311
  Top 0.127: TET75.P$1 24.1,47.6 J10.P$5
N$312
  Top 0.127: TET77.P$2 28.2,46.4 28.8,48.2 28.5,50.5 J10.P$10
N$313
  Top 0.127: TET77.P$4 J10.P$12
N$314
  Top 0.127: J10.P$11 29.2,49.4 TET77.P$3
N$315
  Top 0.127: TET76.P$3 J10.P$7
N$316
  Top 0.127: TET76.P$4 J10.P$8
N$317
  Top 0.127: TET76.P$2 25,47.1 J10.P$6
N$318
  Top 0.127: TET75.P$3 J10.P$3
N$319
  Top 0.127: TET75.P$4 J10.P$4
N$320
  Top 0.127: TET75.P$2 22.1,49.6 J10.P$2
N$321
  Top 0.127: J11.P$35 37.64,56.1 37.2,56.9 TET82.P$1
N$322
  Top 0.127: J11.P$32 39.37,54.7 39.01,57.1 39.2,58 TET82.P$2
N$323
  Top 0.127: TET82.P$3 J11.P$33
N$324
  Top 0.127: TET82.P$4 J11.P$34
N$325
  Top 0.127: J11.P$28 41.96,55.99 41.87,58.2 42.2,59.4 TET81.P$2
N$326
  Top 0.127: TET81.P$4 J11.P$30
N$327
  Top 0.127: J11.P$29 TET81.P$3
N$328
  Top 0.127: J11.P$31 40.46,55.74 40.3,58.19 39.9,59.1 TET81.P$1
N$329
  Top 0.127: J11.P$27 43.3,55.56 43.2,59.3 TET88.P$1
N$330
  Top 0.127: J11.P$24 44.95,56.61 45.5,58.4 TET88.P$2
N$331
  Top 0.127: TET88.P$4 J11.P$26
N$332
  Top 0.127: TET88.P$3 J11.P$25
N$333
  Top 0.127: J11.P$23 45.81,55.9 46.3,58.3 TET87.P$1
N$334
  Top 0.127: J11.P$20 47.77,55.89 48.6,57.2 TET87.P$2
N$335
  Top 0.127: TET87.P$4 J11.P$22
N$336
  Top 0.127: TET87.P$3 J11.P$21
N$337
  Top 0.127: J11.P$17 47.6,49.3 48,48.8 TET86.P$1
N$338
  Top 0.127: TET86.P$2 46.3,47.6 J11.P$14
N$339
  Top 0.127: TET86.P$4 J11.P$16
N$340
  Top 0.127: TET86.P$3 J11.P$15
N$341
  Top 0.127: J11.P$13 45.3,47.3 TET85.P$1
N$342
  Top 0.127: TET84.P$1 41.9,46.3 42.01,48.1 41.98,48.95 41.98,49.55 42.18,50.7 J11.P$9
N$343
  Top 0.127: TET83.P$1 38.9,47.6 J11.P$5
N$344
  Top 0.127: TET85.P$2 43,46.4 43.6,48.2 43.3,50.5 J11.P$10
N$345
  Top 0.127: TET85.P$4 J11.P$12
N$346
  Top 0.127: J11.P$11 44,49.4 TET85.P$3
N$347
  Top 0.127: TET84.P$3 J11.P$7
N$348
  Top 0.127: TET84.P$4 J11.P$8
N$349
  Top 0.127: TET84.P$2 39.8,47.1 J11.P$6
N$350
  Top 0.127: TET83.P$3 J11.P$3
N$351
  Top 0.127: TET83.P$4 J11.P$4
N$352
  Top 0.127: TET83.P$2 36.9,49.6 J11.P$2
N$353
  Top 0.127: J12.P$35 52.44,56.1 52,56.9 TET90.P$1
N$354
  Top 0.127: J12.P$32 54.17,54.7 53.81,57.1 54,58 TET90.P$2
N$355
  Top 0.127: TET90.P$3 J12.P$33
N$356
  Top 0.127: TET90.P$4 J12.P$34
N$357
  Top 0.127: J12.P$28 56.76,55.99 56.67,58.2 57,59.4 TET89.P$2
N$358
  Top 0.127: TET89.P$4 J12.P$30
N$359
  Top 0.127: J12.P$29 TET89.P$3
N$360
  Top 0.127: J12.P$31 55.26,55.74 55.1,58.19 54.7,59.1 TET89.P$1
N$361
  Top 0.127: J12.P$27 58.1,55.56 58,59.3 TET96.P$1
N$362
  Top 0.127: J12.P$24 59.75,56.61 60.3,58.4 TET96.P$2
N$363
  Top 0.127: TET96.P$4 J12.P$26
N$364
  Top 0.127: TET96.P$3 J12.P$25
N$365
  Top 0.127: J12.P$23 60.61,55.9 61.1,58.3 TET95.P$1
N$366
  Top 0.127: J12.P$20 62.57,55.89 63.4,57.2 TET95.P$2
N$367
  Top 0.127: TET95.P$4 J12.P$22
N$368
  Top 0.127: TET95.P$3 J12.P$21
N$369
  Top 0.127: J12.P$17 62.4,49.3 62.8,48.8 TET94.P$1
N$370
  Top 0.127: TET94.P$2 61.1,47.6 J12.P$14
N$371
  Top 0.127: TET94.P$4 J12.P$16
N$372
  Top 0.127: TET94.P$3 J12.P$15
N$373
  Top 0.127: J12.P$13 60.1,47.3 TET93.P$1
N$374
  Top 0.127: TET92.P$1 56.7,46.3 56.81,48.1 56.78,48.95 56.78,49.55 56.98,50.7 J12.P$9
N$375
  Top 0.127: TET91.P$1 53.7,47.6 J12.P$5
N$376
  Top 0.127: TET93.P$2 57.8,46.4 58.4,48.2 58.1,50.5 J12.P$10
N$377
  Top 0.127: TET93.P$4 J12.P$12
N$378
  Top 0.127: J12.P$11 58.8,49.4 TET93.P$3
N$379
  Top 0.127: TET92.P$3 J12.P$7
N$380
  Top 0.127: TET92.P$4 J12.P$8
N$381
  Top 0.127: TET92.P$2 54.6,47.1 J12.P$6
N$382
  Top 0.127: TET91.P$3 J12.P$3
N$383
  Top 0.127: TET91.P$4 J12.P$4
N$384
  Top 0.127: TET91.P$2 51.7,49.6 J12.P$2
REF1  (via drill 0.61)
  Top 0.152: v21.7,15.79 22.4,15.1 J1.P$36 | v33.9,10.21 33.2,10.91 J1.P$18
  Bottom 0.128: 29.6,14.02 32.63,14.02 33.13,13.51 33.13,10.97 v33.9,10.21
  Bottom 0.152: 29.6,14.02 23.48,14.02 v21.7,15.79
REF2  (via drill 0.61)
  Top 0.152: v36.5,15.79 37.2,15.1 J2.P$36 | v48.7,10.21 47.99,10.91 J2.P$18
  Bottom 0.128: 44.4,14.02 47.43,14.02 47.93,13.51 47.93,10.97 v48.7,10.21
  Bottom 0.152: 44.4,14.02 38.28,14.02 v36.5,15.79
REF3  (via drill 0.61)
  Top 0.152: v51.3,15.79 52,15.1 J3.P$36 | v63.5,10.21 62.8,10.91 J3.P$18
  Bottom 0.128: 59.2,14.02 62.23,14.02 62.73,13.51 62.73,10.97 v63.5,10.21
  Bottom 0.152: 59.2,14.02 53.08,14.02 v51.3,15.79
REF4  (via drill 0.61)
  Top 0.152: v6.9,15.79 7.6,15.1 J5.P$36 | v19.1,10.21 18.39,10.91 J5.P$18
  Bottom 0.128: 14.8,14.02 17.83,14.02 18.33,13.51 18.33,10.97 v19.1,10.21
  Bottom 0.152: 14.8,14.02 8.68,14.02 v6.9,15.79
REF5  (via drill 0.61)
  Top 0.152: v6.9,35.79 7.6,35.1 J4.P$36 | v19.1,30.21 18.39,30.91 J4.P$18
  Bottom 0.128: 14.8,34.02 17.83,34.02 18.33,33.51 18.33,30.97 v19.1,30.21
  Bottom 0.152: 14.8,34.02 8.68,34.02 v6.9,35.79
REF6  (via drill 0.61)
  Top 0.152: v21.7,35.79 22.4,35.1 J6.P$36 | v33.9,30.21 33.2,30.91 J6.P$18
  Bottom 0.128: 29.6,34.02 32.63,34.02 33.13,33.51 33.13,30.97 v33.9,30.21
  Bottom 0.152: 29.6,34.02 23.48,34.02 v21.7,35.79
REF7  (via drill 0.61)
  Top 0.152: v36.5,35.79 37.2,35.1 J7.P$36 | v48.7,30.21 47.99,30.91 J7.P$18
  Bottom 0.128: 44.4,34.02 47.43,34.02 47.93,33.51 47.93,30.97 v48.7,30.21
  Bottom 0.152: 44.4,34.02 38.28,34.02 v36.5,35.79
REF8  (via drill 0.61)
  Top 0.152: v51.3,35.79 52,35.1 J8.P$36 | v63.5,30.21 62.8,30.91 J8.P$18
  Bottom 0.128: 59.2,34.02 62.23,34.02 62.73,33.51 62.73,30.97 v63.5,30.21
  Bottom 0.152: 59.2,34.02 53.08,34.02 v51.3,35.79
REF9  (via drill 0.61)
  Top 0.152: v6.9,55.79 7.6,55.1 J9.P$36 | v19.1,50.21 18.39,50.91 J9.P$18
  Bottom 0.128: 14.8,54.02 17.83,54.02 18.33,53.51 18.33,50.97 v19.1,50.21
  Bottom 0.152: 14.8,54.02 8.68,54.02 v6.9,55.79
REF10  (via drill 0.61)
  Top 0.152: v21.7,55.79 22.4,55.1 J10.P$36 | v33.9,50.21 33.2,50.91 J10.P$18
  Bottom 0.128: 29.6,54.02 32.63,54.02 33.13,53.51 33.13,50.97 v33.9,50.21
  Bottom 0.152: 29.6,54.02 23.48,54.02 v21.7,55.79
REF11  (via drill 0.61)
  Top 0.152: v36.5,55.79 37.2,55.1 J11.P$36 | v48.7,50.21 47.99,50.91 J11.P$18
  Bottom 0.128: 44.4,54.02 47.43,54.02 47.93,53.51 47.93,50.97 v48.7,50.21
  Bottom 0.152: 44.4,54.02 38.28,54.02 v36.5,55.79
REF12  (via drill 0.61)
  Top 0.152: v51.3,55.79 52,55.1 J12.P$36 | v63.5,50.21 62.8,50.91 J12.P$18
  Bottom 0.128: 59.2,54.02 62.23,54.02 62.73,53.51 62.73,50.97 v63.5,50.21
  Bottom 0.152: 59.2,54.02 53.08,54.02 v51.3,55.79

## Text on the board
Dimension: V-CUT | V-CUT | V-CUT | V-CUT | V-CUT
tPlace: 2 | 3 | 2 | 3 | 2 | 3 | 2 | 3 | 1 | 4 | 1 | 4 | 1 | 4 | 1 | 4 | R | R | R | R | G | G | G | G | G | G | G | G | R | R | R | R | 8 | 8 | 8 | 8 | 5 | 5 | 5 | 5 | 7 | 6 | 7 | 6 | 7 | 6 | 7 | 6 | 2 | 3 | 2 | 3 | 2 | 3 | 2 | 3 | 1 | 4 | 1 | 4 | 1 | 4 | 1 | 4 | R | R | R | R | G | G | G | G | G | G | G | G | R | R | R | R | 8 | 8 | 8 | 8 | 5 | 5 | 5 | 5 | 7 | 6 | 7 | 6 | 7 | 6 | 7 | 6 | 2 | 3 | 2 | 3 | 2 | 3 | 2 | 3 | 1 | 4 | 1 | 4 | 1 | 4 | 1 | 4 | R | R | R | R | G | G | G | G | G | G | G | G | R | R | R | R | 8 | 8 | 8 | 8 | 5 | 5 | 5 | 5 | 7 | 6 | 7 | 6 | 7 | 6 | 7 | 6